# Altium PCB WheelLED_Pcb.PcbDoc
Units mil, origin at the board's own origin, x right, y up, seen from the top; angles counter-clockwise.
Board outline 4466.37 x 8646.57 mil, 2 copper layers (Top Layer, Bottom Layer); 53 components, 39 nets, 147 pads, 47 vias.
Unrouted connection lines stored in the file: 16.
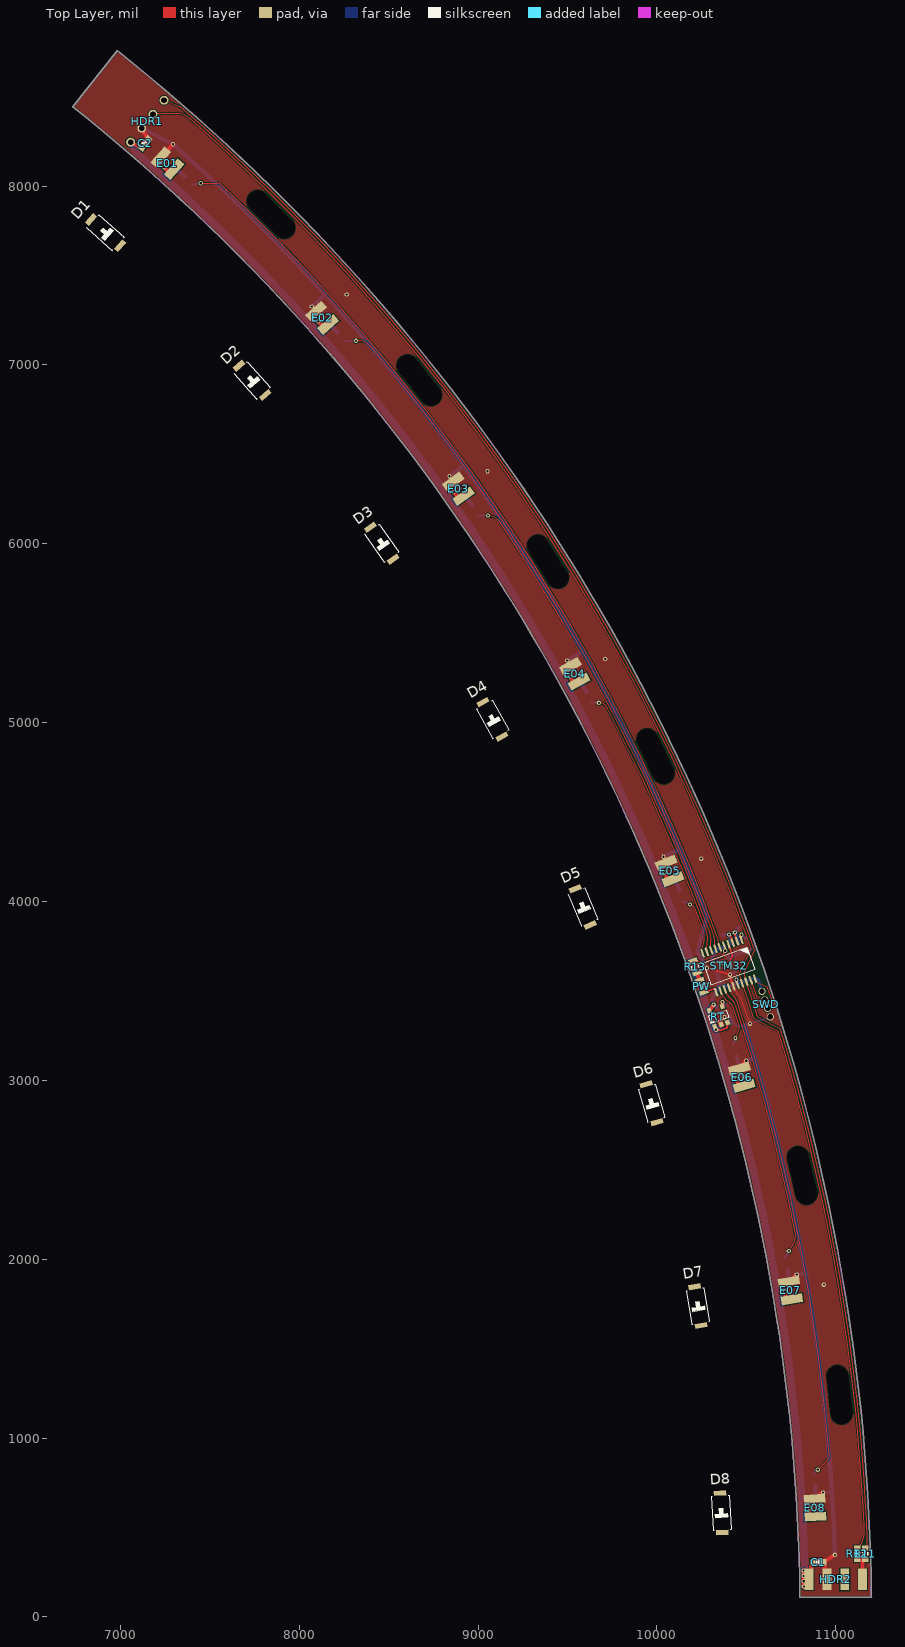
[diagram p0: Top Layer view]
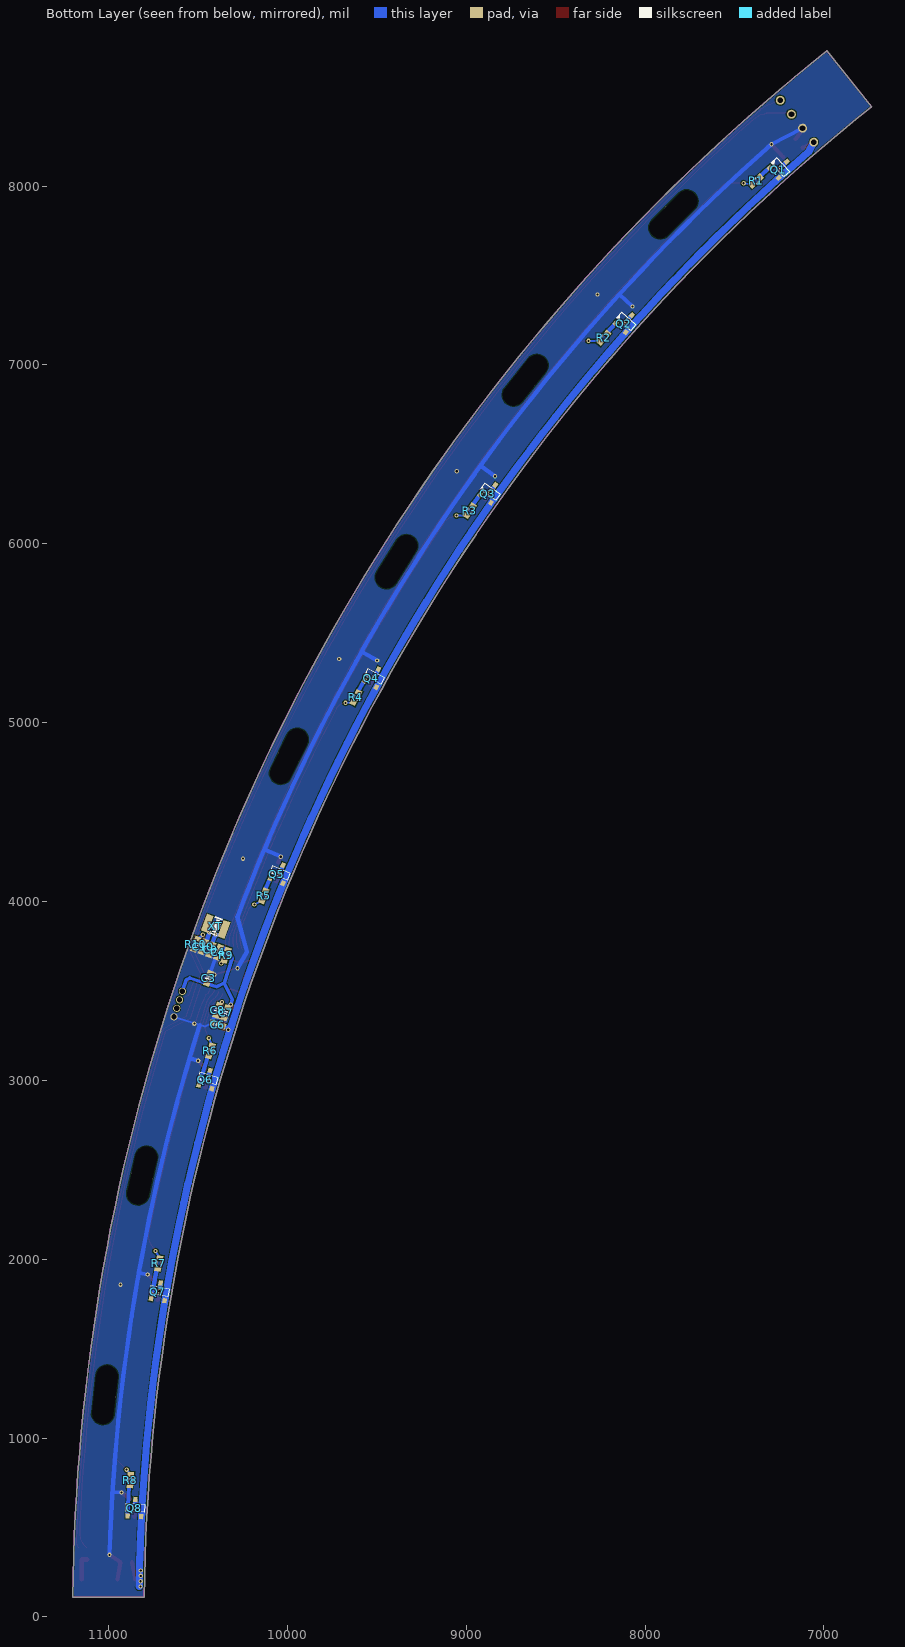
[diagram p1: Bottom Layer view, seen from below]

## Layer stack, top to bottom
Top Solder: solder mask 0.4, Solder Resist, Dk 3.5
Top Layer: signal copper 1.4
Dielectric1: dielectric 12.6, FR-4, Dk 4.8
Bottom Layer: signal copper 1.4
Bottom Solder: solder mask 0.4, Solder Resist, Dk 3.5

## Board outline
10799.44,109.99 ccw(c0,0) 6733.63,8443.83 6983.02,8756.56 cw(c0,0) 11199.46,109.99 11200,110

## Design rules (kind name [scope] priority, off if disabled: settings)
Clearance ClearancePolygon [InPolygon] p1: gap=6
Clearance [All] p2: gap=6
ComponentClearance [All] p1: gap=0 collisioncheckmode=3 verticalgap=0 showdistances=FALSE
Height [All] p1: minheight=0 maxheight=5000 prefheight=500
HoleSize [All] p1: absolutevalues=TRUE maxlimit=200 minlimit=1 maxpercent=80.000 minpercent=20.000
HoleToHoleClearance [All] p1: gap=6 allowstackedmicrovias=TRUE
MinimumSolderMaskSliver [All] p1: minsoldermaskwidth=4
PlaneConnect [All] p1: planeconnectstyle=Direct reliefexpansion=20 reliefentries=4 reliefconductorwidth=20 reliefairgap=10
PolygonConnect [All] p1: connectstyle=Direct reliefconductorwidth=20 reliefentries=4 polygonreliefangle="90 Angle" airgapwidth=10
RoutingVias [All] p1: holewidth=12 width=20 viastyle="Through Hole" minholewidth=12 minwidth=20 maxholewidth=100 maxwidth=200
SilkToSilkClearance [All] p1: silktosilkclearance=0
SilkToSolderMaskClearance SilkscreenOverComponentPads [IsPad] p1: minsilkscreentomaskgap=1 clearancetoexposedcopper=TRUE
SolderMaskExpansion [All] p1: expansion=2
Width [All] p1: maxlimit=64 minlimit=6 preferedwidth=10
22 further rules are at their usual default settings.

## Components (designator, comment, footprint, x,y, rotation, side; value= is the part's Value field where it differs from the comment)
C1 "Cap_0603" CAP_0603 10900.71,305.84 r180 top
C2 "Cap_0603" CAP_0603 7138.48,8238.56 r231.43 top
C3 "Cap_0603" CAP_0603 10441.05,3571.5 r288.88 bottom
C4 "Cap_0603" CAP_0603 10385.23,3715.9 r109.69 bottom
C6 "Cap_0603" CAP_0603 10390.01,3311.59 r197.68 bottom
C7 "Cap_0603" CAP_0603 10342.77,3376.61 r108.08 bottom
C8 "Cap_0603" CAP_0603 10390.3,3392.13 r108.08 bottom
C9 "Cap_0603" CAP_0603 10427.6,3731.06 r289.69 bottom
C10 "Cap_0603" CAP_0603 10469.97,3746.22 r289.69 bottom
D1 "LED_5730" LED_5730_WHITE 6916.68,7739.77 r138.21 top
D2 "LED_5730" LED_5730_WHITE 7736.04,6913.35 r131.79 top
D3 "LED_5730" LED_5730_WHITE 8461.44,6003.71 r125.36 top
D4 "LED_5730" LED_5730_WHITE 9080.44,5018.58 r118.93 top
D5 "LED_5730" LED_5730_WHITE 9585.25,3970.34 r112.5 top
D6 "LED_5730" LED_5730_WHITE 9969.52,2872.17 r106.07 top
D7 "LED_5730" LED_5730_WHITE 10228.41,1737.88 r99.64 top
D8 "LED_5730" LED_5730_WHITE 10358.68,581.73 r93.21 top
E01 "HDR1x2_2.54" HDR1X2_2.54_180H 7263.18,8127.5 r228.21 top locked
E02 "HDR1x2_2.54" HDR1X2_2.54_180H 8127.5,7263.18 r221.79 top locked
E03 "HDR1x2_2.54" HDR1X2_2.54_180H 8889.61,6307.52 r215.36 top
E04 "HDR1x2_2.54" HDR1X2_2.54_180H 9539.94,5272.54 r208.93 top locked
E05 "HDR1x2_2.54" HDR1X2_2.54_180H 10070.29,4171.25 r202.5 top locked
E06 "HDR1x2_2.54" HDR1X2_2.54_180H 10474,3017.51 r196.07 top locked
E07 "HDR1x2_2.54" HDR1X2_2.54_180H 10745.99,1825.82 r189.64 top locked
E08 "HDR1x2_2.54" HDR1X2_2.54_180H 10882.85,611.17 r183.21 top locked
HDR1 "HDR1x4_2.54" HDR1X4_2.54_90F 7057.08,8245.51 r141.43 top
HDR2 "HDR1x4_2.54" HDR1X4_2.54_180H 11150,210 r270 top
PW "LED_0805" LED_0805_GREEN 10250.37,3526.42 r288.98 top
Q1 "BJT_PNP" SOT23-3 7243.18,8105.13 r138.21 bottom
Q2 "BJT_PNP" SOT23-3 8105.13,7243.19 r131.79 bottom
Q3 "BJT_PNP" SOT23-3 8865.14,6290.16 r125.36 bottom
Q4 "BJT_PNP" SOT23-3 9513.68,5258.03 r118.93 bottom
Q5 "BJT_PNP" SOT23-3 10042.57,4159.77 r112.5 bottom
Q6 "BJT_PNP" SOT23-3 10445.17,3009.2 r106.07 bottom
Q7 "BJT_PNP" SOT23-3 10716.42,1820.79 r99.64 bottom
Q8 "BJT_PNP" SOT23-3 10852.9,609.49 r93.21 bottom
R1 "Res_0603" RES_0603 7379.83,8028.52 r138.2 bottom
R2 "Res_0603" RES_0603 8232.34,7151.76 r130.98 bottom
R3 "Res_0603" RES_0603 8981.32,6185.06 r124.55 bottom
R4 "Res_0603" RES_0603 9617.35,5140.58 r118.12 bottom
R5 "Res_0603" RES_0603 10132.44,4031.46 r111.7 bottom
R6 "Res_0603" RES_0603 10430.65,3164.1 r286.88 bottom
R7 "Res_0603" RES_0603 10719.33,1976.35 r280.45 bottom
R8 "Res_0603" RES_0603 10878.2,764.08 r274.02 bottom
R9 "Res_0603" RES_0603 10342.86,3700.73 r289.69 bottom
R10 "Res_0603" RES_0603 10512.34,3761.38 r289.69 bottom
R11 "Res_0603" RES_0603 11165,353 r270 top
R12 "Res_0603" RES_0603 11120,353 r270 top
R13 "Res_0805" RES_0805 10212.7,3634.04 r109.59 top
RT "RT9193" SOT23-5 10343.92,3356.93 r107.98 top
STM32 "STM32F03xF" TSSOP_E170_P0.65_20 10401.59,3639.68 r289.29 top locked
SWD "HDR1x4_1.27" HDR1X4_1.27_180 10587.24,3497.55 r18.28 top
XT "XTAL_3225_2P" XT_3225_2 10401.47,3861.15 r200.37 bottom

## Footprints (in the part's own frame and the unit in brackets; to place one, negate y for a bottom-side part, rotate by r counter-clockwise, add the part's x,y. Pads: shape width x height; smd on the part's side, far side on the other; paste and mask are expansions set on the pad)
CAP_0603 [mil]
  rect 28x36 smd: 1(-32,0) 2(32,0)
  silkscreen extent -10,-16 10,16, body extent -31,-16 32,16, height 36
HDR1X2_2.54_180H [mil]
  rect 120x50 smd: 1(0,50) 2(0,-50)
  body extent -35,-100 406,100, height 61
HDR1X4_1.27_180 [mil]
  round 40 hole 30: 1(0,0) 2(0,-50) 3(0,-100) 4(0,-150)
  body extent -49,-175 49,25, height 210
HDR1X4_2.54_90F [mil]
  round 50 hole 32: 1(0,0) 2(0,-100) 3(0,-200) 4(0,-300)
  body extent -10,-355 386,55, height 99
HDR1X4_2.54_180H [mil]
  rect 120x50 smd: 1(0,0) 2(0,-100) 3(0,-200) 4(0,-300)
  body extent -35,-350 406,50, height 61
LED_0805_GREEN [mil]
  rect 26x52 smd: 1(-36,0) 2(36,0)
  silkscreen extent -12,-25 12,24, body extent -40,-25 40,25, height 43
LED_5730_WHITE [mil]
  rect 30x70 smd: 1(-110,0) 2(110,0)
  silkscreen extent -95,-50 95,50
RES_0603 [mil]
  rect 28x36 smd: 1(-32,0) 2(32,0)
  silkscreen extent -10,-16 10,16, body extent -31,-16 32,16, height 20
RES_0805 [mil]
  rect 26x52 smd: 1(-36,0) 2(36,0)
  silkscreen extent -12,-25 12,25, body extent -39,-24 39,24, height 24
SOT23-3 [mil]
  rect 30x24 smd: 1(-47,38) 2(-47,-38) 3(47,0)
  silkscreen extent -21,-53 21,53, body extent -55,-57 55,57, height 51
SOT23-5 [mil]
  rect 30x24 smd: 1(-47,38) 2(-47,0) 3(-47,-38) 4(47,-38) 5(47,38)
  silkscreen extent -21,-53 21,53, body extent -55,-57 55,57, height 57
TSSOP_E170_P0.65_20 [mil]
  oval 50x12 smd: 1(-115,115.16) 2(-115,89.57) 3(-115,63.98) 4(-115,38.39) 5(-115,12.8) 6(-115,-12.8) 7(-115,-38.39) 8(-115,-63.98) 9(-115,-89.57) 10(-115,-115.16) 11(115,-115.16) 12(115,-89.57) 13(115,-63.98) 14(115,-38.39) 15(115,-12.8) 16(115,12.8) 17(115,38.39) 18(115,63.98) 19(115,89.57) 20(115,115.16)
  silkscreen extent -65,-130 65,130, body extent -126,-130 126,130, height 42
XT_3225_2 [mil]
  rect 40x100 smd: 1(-50,0) 2(50,0)
  silkscreen extent -24,-49 24,49, body extent -63,-49 63,49, height 41

## Part data
C1 C2 C3 C4 C6 C7 C8 C9 C10: "Capacitor"
D1 D2 D3 D4 D5 D6 D7 D8 PW: "LED"
E01 E02 E03 E04 E05 E06 E07 E08: library part HDR1x2_2.54T, "Header"
HDR1 HDR2 SWD: "Header"
Q1 Q2 Q3 Q4 Q5 Q6 Q7 Q8: "Transistor"
R1 R2 R3 R4 R5 R6 R7 R8 R9 R10 R11 R12 R13: "Resistor"
RT: "Power"
STM32: "MCU"
XT: "Crystal Oscillator"

## Free pads (board coordinates)
  round 120 hole 120 slot 330 at 135 deg mask-120: 0(7841.81,7841.81)
  round 120 hole 120 slot 330 at 128.57 deg mask-120: 0(8670.51,6914.5)
  round 120 hole 120 slot 330 at 122.14 deg mask-120: 0(9390.17,5900.24)
  round 120 hole 120 slot 330 at 115.71 deg mask-120: 0(9991.74,4811.77)
  round 120 hole 120 slot 330 at 102.86 deg mask-120: 0(10811.95,2467.76)
  round 120 hole 120 slot 330 at 96.43 deg mask-120: 0(11020.27,1241.69)

## Via types
v1: diameter 24, hole 12, Top Layer to Bottom Layer, 47 vias

## Nets (pads, with @x,y where several pads share a name; then routed paths per layer and width w, separated by ;. In a path a pad name is that pad's centre, name@x,y a point inside that pad or via, vN(x,y) a via of type N, cw(c..) or ccw(c..) an arc to the next point about the centre after c; other vN are vias at no path point)
3V3: C3.2 C4.2 C7.2 R9.1 R13.2 RT.5 STM32.5 STM32.16 SWD.1 | length 993.4
  Top Layer w10: R13.2@10202,3664.14 10219.02,3670.21 10253.88,3653.69 10367.36,3694.18 v1(10381.97,3725)
  Top Layer w24: RT.5 v1(10316.86,3423.34)
  Bottom Layer w20: v1(10316.86,3423.34) 10307.56,3451.26 10353.79,3543.66 ; C4.2 R9.1 10307.77,3682.44 10353.79,3543.66 ; SWD.1 10565.8,3562.2 10545.47,3572.41 C3.2 10395.55,3522.7 10353.79,3543.66
  Bottom Layer w24: v1(10316.86,3423.34) C7.2 ; C4.2 v1(10381.97,3725) ; v1(10444.16,3562.4) C3.2
BOOT: R10.1 STM32.1 | length 72.7
  Top Layer w12: v1@10466.76,3814.97 10464.81,3807.68 STM32.1 ; v1@10467.24,3812.72 v1@10471.95,3814.36
  Bottom Layer w12: R10.1@10496.91,3791.16 R10.1
  Bottom Layer w16: v1@10472.08,3814.52 R10.1@10496.91,3793.16
  other v1: 10472.76,3813.97
EXP: PW.2 STM32.11 | length 82.6
  Top Layer w12: PW.2 10317.13,3511.1 10326.29,3506.59 STM32.11
GND: C1.1 C2.1 C3.1 C4.1 C6.1 C7.1 C8.1 C9.2 C10.2 D1.2 D2.2 D3.2 D4.2 D5.2 D6.2 D7.2 D8.2 E01.2 E02.2 E03.2 E04.2 E05.2 E06.2 E07.2 E08.2 HDR1.2 HDR2.3 R10.2 RT.2 STM32.15 SWD.4 | length 12455.1
  Top Layer w6: STM32.15 10444.83,3484.51 10457.89,3479.03 10488.67,3403.74 v1@10519.32,3317.35
  Top Layer w12: v1(10278.81,3627.14) v1(10407.97,3590.84) ; v1@10403.93,3589.32 STM32.15
  Top Layer w24: HDR1.2@7109.42,8328.7 7115.44,8320.7 C2.1 ; E01.2 v1(7293.79,8234.11) ; v1(10037.07,4250.56) E05.2 ; RT.2 10352.21,3328.7 10360.59,3347.24 v1(10377.05,3353.45) ; E06.2 v1(10499.15,3109.71) ; E07.2 v1(10781.32,1914.6) ; E08.2 v1(10927.9,695.42) ; HDR2.3 C1.1 v1(10994.52,347.07)
  Bottom Layer w12: C6.1 10460.71,3300.38 SWD.4
  Bottom Layer w20: C4.1 C9.2 C10.2 R10.2 ; C4.1@10400.12,3687.24 C3.1
  Bottom Layer w24: HDR1.2 v1(7293.79,8234.11) ; 7313.52,8216.6 ccw(c0,0) v1(7293.79,8234.11) ; v1(8069.95,7327.07) 8143.98,7394.29 ; v1(8839.58,6377.45) 8920.67,6435.96 ccw(c0,0) 8862.03,6516.48 ; 9494.64,5554.44 cw(c0,0) 9585.18,5396.69 v1(9498.04,5347.63) ; v1(10037.07,4250.56) 10129.15,4289.56 ccw(c0,0) 10100.78,4355.94 ; 10210.3,4092.64 cw(c0,0) 10280.17,3913.83 ; v1@10278.7,3627.04 v1@10278.7,3627.13 ; v1(10278.81,3627.14) 10226.65,3718.72 10280.17,3913.83 ; C7.1 10376.84,3354.08 C8.1 ; C8.1@10405.48,3363.58 C6.1 ; 10490.71,3308.32 cw(c0,0) v1(10994.52,347.07) ; v1(10499.15,3109.71) 10547.09,3123.91 ; 10530.07,3180.83 cw(c0,0) 10547.09,3123.91 ; 10583.98,2996.57 ccw(c0,0) 10547.09,3123.91 ; v1(10781.32,1914.6) 10830.55,1923.35 ; v1(10927.9,695.42) 10977.79,698.6 ; 10975.71,730.56 cw(c0,0) 10977.79,698.6 ; 10986.79,538.89 ccw(c0,0) 10977.79,698.6 ; v1(7293.79,8234.11) cw(c0,0) 10280.17,3913.83 ; 10804.87,2062.72 cw(c0,0) 10830.55,1923.35 ; 10804.87,2062.72 cw(c0,0) 10830.55,1923.35 ; 10804.87,2062.72 cw(c0,0) 10830.55,1923.35 ; 10830.55,1923.35 cw(c0,0) 10839.22,1873.83 ccw(c0,0) 10830.55,1923.35
  other v1: 10933.3,1857.67 10520.08,3317 10247.66,4239.53 9710.88,5356.01 9052.94,6405.65 8265.85,7393.5
LED_1: R1.1 STM32.6 | length 5310
  Top Layer w6: v1(7449.21,8016.22) 7538.7,8016.22 cw(c7538.7,7975.83) 7567.25,8004.39 ; 7567.15,8004.28 cw(c0,0) 10338.19,3801.59 cw(c10184.58,3749.81) STM32.6@10346.54,3757 ; STM32.6@10344.84,3760.17 ccw(c10367.71,3760.17) STM32.6
  Bottom Layer w12: R1.1 v1(7449.21,8016.22)
LED_2: R2.1 STM32.7 | length 4054.6
  Top Layer w6: v1(8316.74,7134.52) cw(c8331.01,7046.62) 8395.95,7107.55 ; 8395.63,7107.28 cw(c0,0) 10314.92,3821.32 ; 10315.44,3821.51 cw(c10161.82,3769.72) STM32.7@10322.73,3750.01
  Bottom Layer w12: R2.1 8253.32,7134.52 v1(8316.74,7134.52)
LED_3: R3.1 STM32.8 | length 2803.5
  Top Layer w6: v1(9054.82,6157.87) cw(c9052.15,6072.7) 9124.52,6117.69 ; 9124.04,6117.37 cw(c0,0) 10293.37,3836.25 ; 10293.67,3836.36 cw(c10140.05,3784.58) STM32.8@10296.7,3742.83
  Bottom Layer w12: R3.1 9052.8,6158.71 cw(c9052.8,6155.85) v1(9054.82,6157.87)
LED_4: R4.1 STM32.9 | length 1568.3
  Top Layer w6: v1(9675.13,5110.74) cw(c9675.13,5057.68) 9723.9,5078.57 ; 9723.69,5078.46 cw(c0,0) 10275.9,3840.14 ; STM32.9@10273.12,3735.59 ccw(c10121.28,3792.37) 10276.16,3840.24
  Bottom Layer w12: R4.1 9671.22,5112.36 cw(c9671.22,5106.83) v1(9675.13,5110.74)
LED_5: R5.1 STM32.10 | length 323
  Top Layer w6: v1(10184.79,3983.21) 10198.49,3976.49 ; 10198.52,3976.55 cw(c10185.91,3948.61) 10214.12,3960.59 ; 10214.01,3960.55 cw(c0,0) 10254.42,3854.74 ; STM32.10@10249.38,3731 ccw(c10102.22,3799.02) 10254.46,3854.75
  Bottom Layer w12: R5.1 v1(10184.79,3983.21)
LED_6: R6.1 STM32.12 | length 328.1
  Top Layer w6: STM32.12@10362.62,3485 ccw(c10437.56,3509.22) 10396.43,3442.06 cw(c10355.3,3374.89) 10430.24,3399.11 ; 10430.11,3399.07 cw(c0,0) 10457.16,3314.93 ; v1@10438.22,3236.16 10451.75,3265.49 ccw(c10391.43,3297.61) 10457.51,3315.04
  Bottom Layer w12: R6.1 v1(10438.98,3235.81)
LED_7: R7.1 STM32.13 | length 1567.1
  Top Layer w6: STM32.13@10384.57,3495.5 ccw(c10459.51,3519.72) 10412.08,3456.85 cw(c10364.64,3393.98) 10439.58,3418.2 ; 10439.64,3418.22 cw(c0,0) 10772.67,2149.4 ; v1@10736.32,2046.25 10757.52,2074.76 ; 10757.55,2075.04 ccw(c10674.93,2131.37) 10773.27,2149.52
  Bottom Layer w12: R7.1 v1(10737.44,2045.42)
LED_8: R8.1 STM32.14 | length 2809.9
  Top Layer w6: STM32.14@10409.74,3503.86 ccw(c10484.69,3528.09) 10428.79,3472.6 cw(c10372.89,3417.12) 10447.83,3441.34 cw(c0,0) 10962.68,905.33 cw(c10918.15,905.33) 10949.64,873.84 v1(10898.96,823.17)
  Bottom Layer w12: R8.1 v1(10898.96,823.17)
NetC8_2: C8.2 RT.4 | length 45.6
  Top Layer w24: RT.4 v1(10366.08,3437.97)
  Bottom Layer w24: v1(10366.08,3437.97) C8.2
NetD1_1: D1.1 E01.1 Q1.3 | length 96.8
  Top Layer w24: v1(7243.18,8105.13) E01.1@7280.18,8071.72
  Bottom Layer w24: Q1.3 v1(7243.18,8105.13)
NetD2_1: D2.1 E02.1 Q2.3 | length 96.8
  Top Layer w24: v1(8105.13,7243.19) E02.1@8138.15,7205.85
  Bottom Layer w24: Q2.3 v1(8105.13,7243.19)
NetD3_1: D3.1 E03.1 Q3.3 | length 96.8
  Top Layer w24: v1(8865.14,6290.16) E03.1@8893.77,6249.36
  Bottom Layer w24: Q3.3 v1(8865.14,6290.16)
NetD4_1: D4.1 E04.1 Q4.3 | length 96.9
  Top Layer w24: v1(9513.68,5258.03) E04.1@9537.66,5214.27
  Bottom Layer w24: Q4.3 v1(9513.68,5258.03)
NetD5_1: D5.1 E05.1 Q5.3 | length 96.9
  Top Layer w24: v1(10042.57,4159.77) E05.1@10061.5,4113.61
  Bottom Layer w24: Q5.3 v1(10042.57,4159.77)
NetD6_1: D6.1 E06.1 Q6.3 | length 96.9
  Top Layer w24: v1(10445.17,3009.2) E06.1@10458.82,2961.21
  Bottom Layer w24: Q6.3 v1(10445.17,3009.2)
NetD7_1: D7.1 E07.1 Q7.3 | length 97
  Top Layer w24: v1(10716.42,1820.79) E07.1@10724.62,1771.45
  Bottom Layer w24: Q7.3 v1(10716.42,1820.79)
NetD8_1: D8.1 E08.1 Q8.3 | length 96.9
  Top Layer w24: v1(10852.9,609.49) E08.1@10855.52,559.66
  Bottom Layer w24: Q8.3 v1(10852.9,609.49)
NetHDR2_1: HDR2.1 R11.2 R12.2 | length 140.7
  Top Layer w24: R11.2@11149.57,321.12 11149.57,321 11149.57,320.94 HDR2.1
  Top Layer w28: R12.2 R11.2@11149.57,321
NetPW_1: PW.1 R13.1 | length 42
  Top Layer w24: R13.1 PW.1
NetQ1_1: Q1.1 R1.2 | length 73.1
  Bottom Layer w24: Q1.1@7304.19,8101.58 R1.2@7359.33,8053.55
NetQ2_1: Q2.1 R2.2 | length 73.2
  Bottom Layer w24: Q2.1@8165.27,7232.91 R2.2@8215.1,7179.22
NetQ3_1: Q3.1 R3.2 | length 73.4
  Bottom Layer w24: Q3.1@8923.7,6273.3 R3.2@8967.27,6214.28
NetQ4_1: Q4.1 R4.2 | length 74
  Bottom Layer w24: Q4.1@9569.69,5235.24 R4.2@9606.66,5171.19
NetQ5_1: Q5.1 R5.2 | length 73.6
  Bottom Layer w24: Q5.1@10095.82,4130.5 R5.2@10125.24,4063.07
NetQ6_1: Q6.1 R6.2 | length 168
  Bottom Layer w24: R6.2@10444.72,3134.93 Q6.1
NetQ7_1: Q7.1 R7.2 | length 168.1
  Bottom Layer w24: R7.2@10730.06,1945.75 Q7.1@10761.77,1780.7
NetQ8_1: Q8.1 R8.2 | length 168
  Bottom Layer w24: R8.2@10885.43,732.44 Q8.1@10893.48,564.64
RST: R9.2 STM32.4 | length 141.1
  Top Layer w10: v1(10370.01,3654.15) 10408.71,3667.96 10422.57,3697.2 STM32.4
SCL/TX: HDR1.3 R12.1 STM32.17 | length 9406
  Top Layer w6: HDR1.3@7181.77,8405.88 7323.41,8405.88 ; 7318.41,8405.88 cw(c7318.41,8305.88) 7389.12,8376.59 ; 7389.2,8376.67 cw(c0,0) 10526.91,3735.39 10458.75,3591.61 STM32.17 ; STM32.17@10476.7,3544.33 cw(c0,0) 10540.95,3348.43 ; 10541.03,3348.58 10679.37,3275.14 ; 10679.09,3275.05 cw(c0,0) 11158.4,508.96 11158.4,464.82 cw(c11058.4,464.82) 11129.11,394.11 R12.1
SDA/RX: HDR1.4 R11.1 STM32.18 | length 9364.4
  Top Layer w6: HDR1.4 7325.49,8446.27 cw(c7299.95,8374.97) 7353.5,8428.53 ; 7353.21,8428.2 cw(c0,0) 10545.59,3727.55 10483.87,3597.35 STM32.18 ; STM32.18@10500.37,3552.4 cw(c0,0) 10564.78,3355.98 ; 10564.83,3356.06 10690.5,3289.49 ; 10690.36,3289.45 cw(c0,0) 11176.68,431.28 11176.68,413.2 cw(c11136.8,413.2) R11.1
SWCLK: STM32.20 SWD.3 | length 214.7
  Top Layer w6: STM32.20 10554.41,3551.96 10613.65,3523.88 10640.47,3448.72 SWD.3
SWDIO: STM32.19 SWD.2 | length 146
  Top Layer w6: STM32.19 10555.59,3472.51 SWD.2
VIN: C1.2 C2.2 C6.2 HDR1.1 HDR2.4 Q1.2 Q2.2 Q3.2 Q4.2 Q5.2 Q6.2 Q7.2 Q8.2 RT.1 RT.3 | length 10664.3
  Top Layer w12: RT.1@10321.24,3285.58 10352.89,3279.83 10391.02,3291.91 10396.77,3323.56 RT.3@10397.19,3325.86
  Top Layer w24: HDR1.1@7047.08,8250.51 7057,8245.38 C2.2 ; v1@10819.74,258.54 HDR2.4@10829.64,258.54 ; v1(10819.74,259.54) 10820.3,229.55 10820.6,213.45 ; v1@10820.6,209.45 10820.82,197.61 v1(10821.34,169.68) HDR2.4@10828.34,162.68 ; HDR2.4 C1.2
  Bottom Layer w24: 10318.55,3288.85 10328.08,3291.88 C6.2
  Bottom Layer w40: HDR1.1 7088.23,8188.16 cw(c0,0) v1@10828.67,169.79 ; 10305.86,3328.37 cw(c0,0) 10318.55,3288.85 ; 10305.86,3328.37 cw(c0,0) 10318.55,3288.85 ; 10305.86,3328.37 cw(c0,0) 10318.55,3288.85 ; 10305.86,3328.37 cw(c0,0) 10318.55,3288.85 ; 10318.55,3288.85 cw(c0,0) 10362.38,3148 ; 10318.55,3288.85 cw(c0,0) 10362.38,3148 ; 10318.55,3288.85 cw(c0,0) 10362.38,3148 ; 10318.55,3288.85 cw(c0,0) 10362.38,3148 ; 10318.55,3288.85 cw(c0,0) 10362.38,3148 ; 10318.55,3288.85 cw(c0,0) 10362.38,3148
  other v1: 10820.61,199.61 10819.74,229.54 10330.95,3282.85
XIN: C10.1 STM32.2 XT.1 | length 143.4
  Top Layer w12: v1(10435.33,3826.99) 10432.79,3821.72 STM32.2
  Bottom Layer w24: C10.1@10453.67,3774.58 v1(10435.33,3826.99) XT.1@10458.51,3853.93
XOUT: C9.1 STM32.3 XT.2 | length 143.4
  Top Layer w12: v1(10402.45,3814.98) 10409.16,3811.75 STM32.3
  Bottom Layer w24: XT.2@10367.02,3812.33 v1(10402.45,3814.98) C9.1@10420.79,3762.57
pads on no net: HDR2.2

## Polygon pours and split planes (outlines as drawn)
GND on Top Layer "Bottom Layer-No Net" (hatched 45Degree grid 4 track 6, remove dead copper, shelved, pour order 9): -18280,-20395 ccw(c-18295,-20395) -18295,-20380 -20066.1,-20380 -20074.68,-20380 ccw(c-20074.69,-20479.99) -20145.39,-20409.29 -20170,-20433.9 -20206.81,-20470.71 cw(c-20277.52,-20400.01) -20277.52,-20500 -20350,-20500 -20714.68,-20500 cw(c-20714.68,-20400) -20785.39,-20470.71 -20815,-20441.1 -20846.81,-20409.29 ccw(c-20917.52,-20479.99) -20917.52,-20380 -21060,-20380 -24712.48,-20380 ccw(c-24712.48,-20479.99) -24783.19,-20409.29 -24810,-20436.1 -24844.61,-20470.71 cw(c-24915.32,-20400.01) -24915.32,-20500 -25135,-20500 -25352.48,-20500 cw(c-25352.48,-20400) -25423.19,-20470.71 -25448.9,-20445 -25484.61,-20409.29 ccw(c-25555.31,-20479.99) -25555.32,-20380 -25860,-20380 -27305,-20380 ccw(c-27305,-20395) -27320,-20395 -27320,-20575 ccw(c-27305,-20575) -27305,-20590 -27250,-20590 -27234.22,-20590 cw(c-27234.21,-20689.99) -27163.51,-20619.29 -27130,-20652.8 -27107.08,-20675.71 ccw(c-27027.15,-20599.81) -27030,-20710 -23235,-20710 ccw(c-23239.08,-20603.54) -23160.71,-20675.71 -23120,-20635 -23104.29,-20619.29 cw(c-23033.58,-20689.99) -23033.58,-20590 -22985,-20590 -22596.42,-20590 cw(c-22596.41,-20689.98) -22525.71,-20619.29 -22490,-20655 -22464.29,-20680.71 ccw(c-22393.58,-20610) -22393.58,-20710 -18645,-20710 -18598.63,-20710 ccw(c-18598.63,-20610) -18527.92,-20680.71 -18500,-20652.8 -18466.49,-20619.29 cw(c-18395.79,-20689.99) -18395.78,-20590 -18335,-20590 -18295,-20590 ccw(c-18295,-20575) -18280,-20575
GND on Top Layer "Mechanical 1-No Net" (solid, remove dead copper, pour order 2): 10799.44,110.08 ccw(c0,0) 6733.63,8443.83 6983.02,8756.56 cw(c0,0) 11199.46,110.05 11200,110
GND on Bottom Layer "Bottom Layer-No Net" (hatched 45Degree grid 4 track 6, remove dead copper, shelved, pour order 10): -18280,-20395 ccw(c-18295,-20395) -18295,-20380 -20066.1,-20380 -20074.68,-20380 ccw(c-20074.69,-20479.99) -20145.39,-20409.29 -20170,-20433.9 -20206.81,-20470.71 cw(c-20277.52,-20400.01) -20277.52,-20500 -20350,-20500 -20714.68,-20500 cw(c-20714.68,-20400) -20785.39,-20470.71 -20815,-20441.1 -20846.81,-20409.29 ccw(c-20917.52,-20479.99) -20917.52,-20380 -21060,-20380 -24712.48,-20380 ccw(c-24712.48,-20479.99) -24783.19,-20409.29 -24810,-20436.1 -24844.61,-20470.71 cw(c-24915.32,-20400.01) -24915.32,-20500 -25135,-20500 -25352.48,-20500 cw(c-25352.48,-20400) -25423.19,-20470.71 -25448.9,-20445 -25484.61,-20409.29 ccw(c-25555.31,-20479.99) -25555.32,-20380 -25860,-20380 -27305,-20380 ccw(c-27305,-20395) -27320,-20395 -27320,-20575 ccw(c-27305,-20575) -27305,-20590 -27250,-20590 -27234.22,-20590 cw(c-27234.21,-20689.99) -27163.51,-20619.29 -27130,-20652.8 -27107.08,-20675.71 ccw(c-27027.15,-20599.81) -27030,-20710 -23235,-20710 ccw(c-23239.08,-20603.54) -23160.71,-20675.71 -23120,-20635 -23104.29,-20619.29 cw(c-23033.58,-20689.99) -23033.58,-20590 -22985,-20590 -22596.42,-20590 cw(c-22596.41,-20689.98) -22525.71,-20619.29 -22490,-20655 -22464.29,-20680.71 ccw(c-22393.58,-20610) -22393.58,-20710 -18645,-20710 -18598.63,-20710 ccw(c-18598.63,-20610) -18527.92,-20680.71 -18500,-20652.8 -18466.49,-20619.29 cw(c-18395.79,-20689.99) -18395.78,-20590 -18335,-20590 -18295,-20590 ccw(c-18295,-20575) -18280,-20575
GND on Bottom Layer "Mechanical 1-No Net" (solid, remove dead copper, pour order 5): 10799.44,110.08 ccw(c0,0) 6733.63,8443.83 6983.02,8756.56 cw(c0,0) 11199.46,110.05 11200,110

## Keep-outs
Keep-Out Layer:
  lines w2: 10799.44,110.08 ccw(c0,0) 6733.63,8443.83 6983.02,8756.56 cw(c0,0) 11199.46,110.05 ; 10800,110 11200,110

## Silkscreen, mask and mechanical layers (free items; w line width, h text height)
Mechanical 1:
  circle w10: c0,0 r11318.9
  circle w10: c0,0 r10374.02
  circle w10: c0,0 r10767.72
  lines w2: 0,0 11318.9,0 ; 10799.44,109.99 ccw(c0,0) 6733.63,8443.83 6983.02,8756.56 cw(c0,0) 11199.46,109.99 ; 10800,0 11200,0 ; 10800,110 11200,110
Mechanical 4:
  lines w5: -27452.8,-20545 -22815,-20545 ; -26873.07,-21345 -26873.07,-19745 ; -26293.35,-21345 -26293.35,-19745 ; -25713.62,-21345 -25713.62,-19745 ; -25133.9,-21345 -25133.9,-19745 ; -24554.17,-21345 -24554.17,-19745 ; -23974.45,-21345 -23974.45,-19745 ; -23394.72,-21345 -23394.72,-19745 ; -22815,-21215 -22815,-20545 ; -22815,-19875 -22815,-20545 ; -22235.28,-21345 -22235.28,-19745 ; -21655.55,-21345 -21655.55,-19745 ; -21075.83,-21345 -21075.83,-19745 ; -20496.1,-21345 -20496.1,-19745 ; -19916.38,-21345 -19916.38,-19745 ; -19336.65,-21345 -19336.65,-19745 ; -18756.93,-21345 -18756.93,-19745 ; -18280,-20545 -22815,-20545 ; -27320,-20710 -22805,-20710 -18280,-20710 -18280,-20380 -22805,-20380 -27320,-20380 -27320,-20710 ; -22860,-20590 -22770,-20590 -22770,-20500 -22860,-20500 -22860,-20590
Mechanical 13:
  circle w5: c11020.27,1241.69 r130.98
  circle w5: c10811.95,2467.76 r130.98
  circle w5: c9991.74,4811.77 r130.98
  circle w5: c9390.17,5900.24 r130.98
  circle w5: c8670.51,6914.5 r130.98
  circle w5: c7841.81,7841.81 r130.98
T-Component:
  lines w2: -2492.21,10919.2 cw(c0,0) 6983.02,8756.56 6733.63,8443.83 ccw(c0,0) -2403.2,10529.23 -2492.21,10919.2 ; 6733.69,-8443.78 ccw(c0,0) 10800,0 11200,0 cw(c0,0) 6983.02,-8756.56 6733.69,-8443.78
B-Component:
  circle w393.7: c0,0 r12244.09
  lines w2: 7771.1,7771.1 7912.52,7912.52 ; 8592.33,6852.15 8748.69,6976.85 ; 9305.5,5847.03 9474.84,5953.44 ; 9901.65,4768.38 10081.84,4855.16 ; 10373.28,3629.77 10562.05,3695.82 ; 10714.46,2445.51 10909.44,2490.01 ; 10920.9,1230.49 11119.64,1252.88 ; -10090.88,4859.45 cw(c0,0) -2492.21,10919.2 -2403.2,10529.23 ccw(c0,0) -9730.49,4685.9 -10090.88,4859.45
  lines w10: 6914.44,8670.56 cw(c0,0) 11090,0

## Panel: embedded boards
"SmartBikeLight_Pcb.PcbDoc" at -18310,-21494.96, 1 rows x 1 columns, spacing 0 x 0, rotation 0
"SmartBikeLight_Pcb.PcbDoc" at -27322,-21094.96, 1 rows x 1 columns, spacing 0 x 0, rotation 0